# Altium PCB XL6009.PcbDoc
Units mil, origin at the board's own origin, x right, y up, seen from the top; angles counter-clockwise.
Board outline 2140 x 1130 mil, 2 copper layers (Top Layer, Bottom Layer); 11 components, 5 nets, 26 pads, 0 vias.
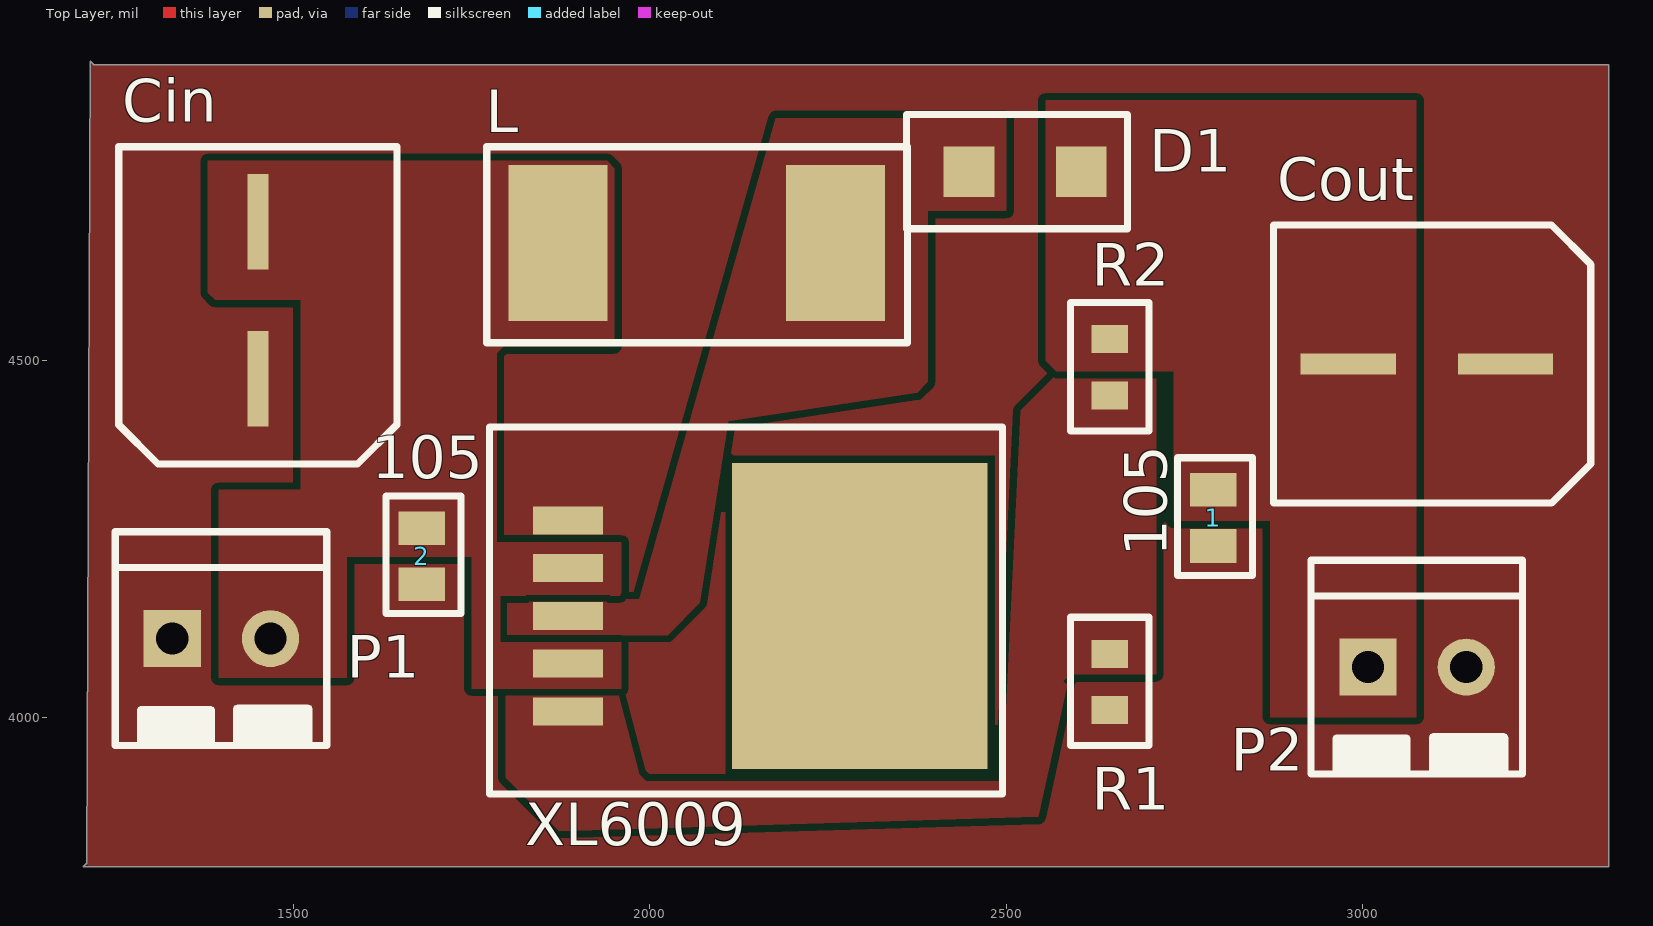
[diagram p0: Top Layer view]
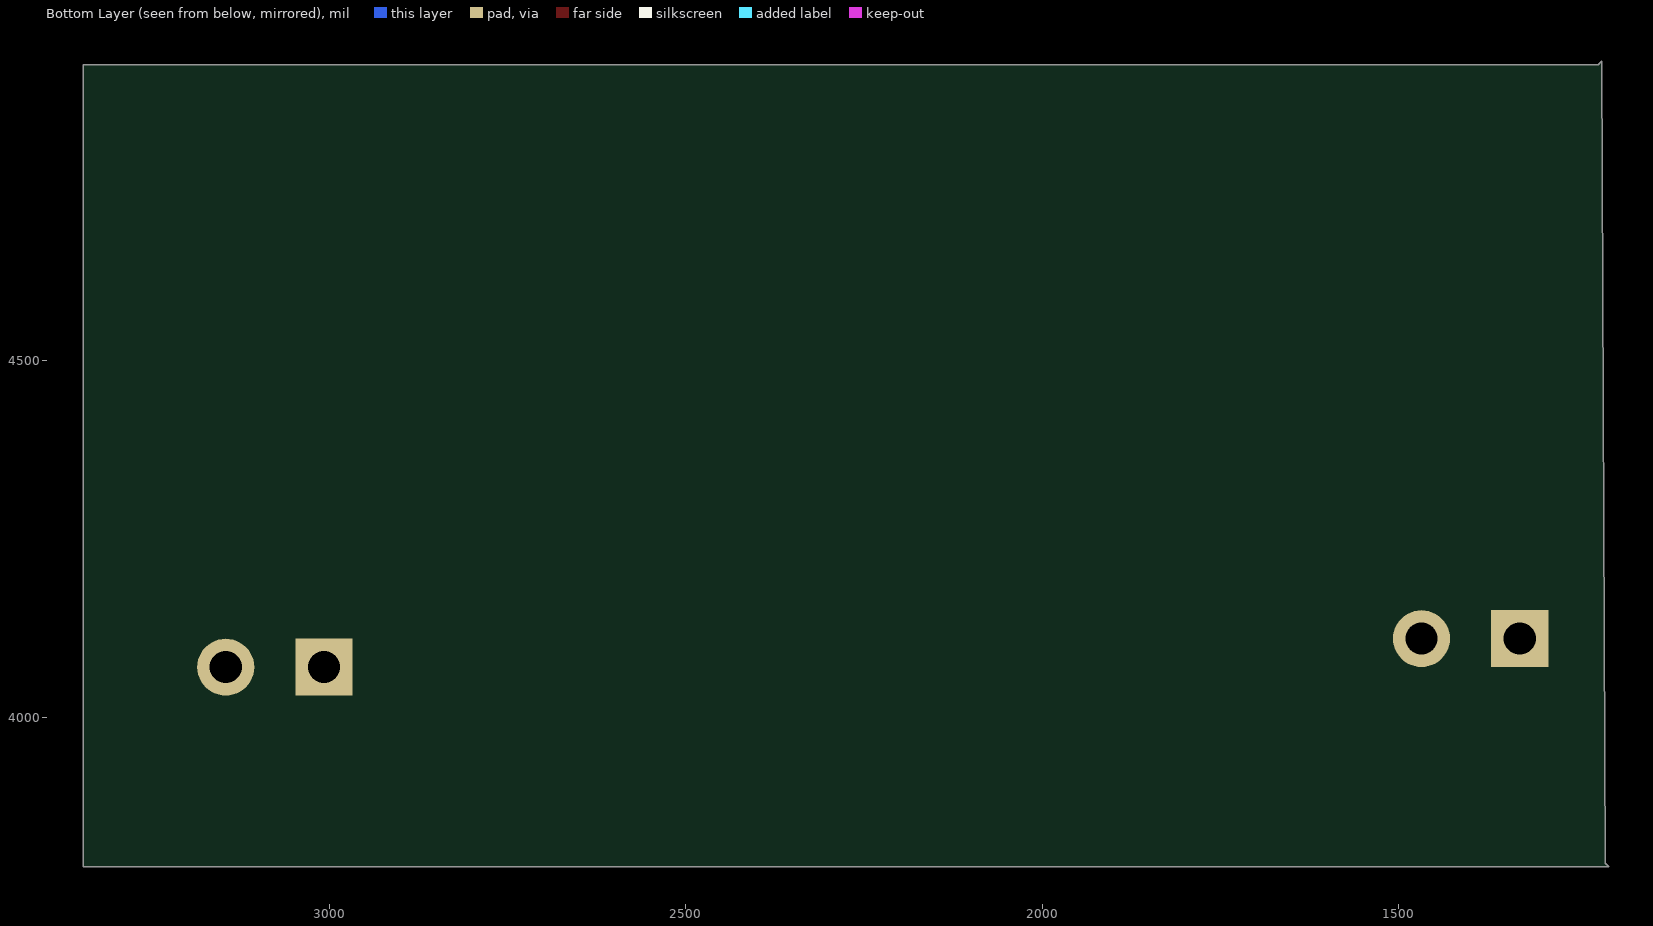
[diagram p1: Bottom Layer view, seen from below]
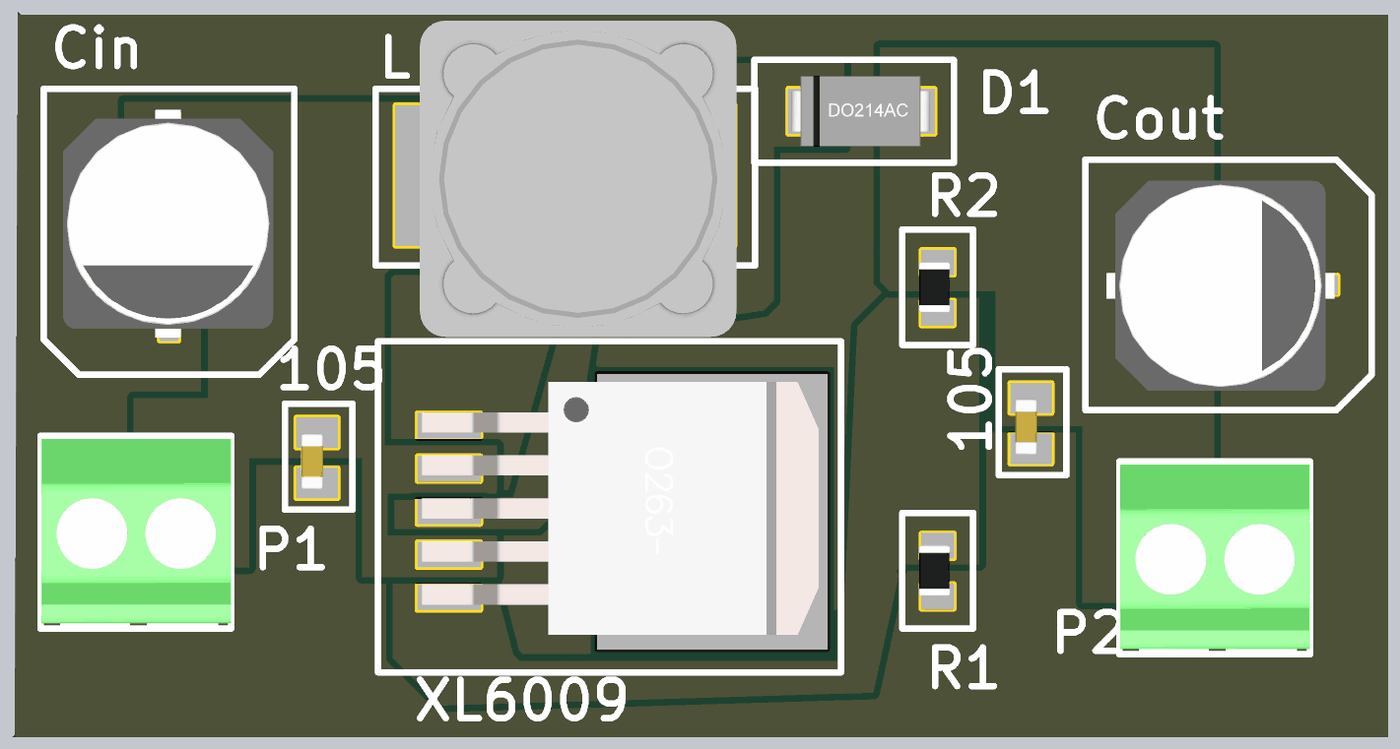
[diagram p2: 3D render of the assembled board from above, using the file's embedded part models]

## Layer stack, top to bottom
Top Solder: solder mask 0.4, Solder Resist, Dk 3.5
Top Layer: signal copper 1.4
Dielectric 1: dielectric 12.6, FR-4, Dk 4.8
Bottom Layer: signal copper 1.4
Bottom Solder: solder mask 0.4, Solder Resist, Dk 3.5

## Board outline
1215,4920 1220,4915 3345,4915 3345,3790 1205,3790 1210,3795

## Design rules (kind name [scope] priority, off if disabled: settings)
Clearance [All] p1: gap=10 ignorepadtopadclearanceinfootprint=FALSE except(0: Arc-Hole Track-Hole SMDPad-Hole THPad-Hole Via-Hole Fill-Hole Poly-Hole Region-Hole Text-Hole)
PolygonConnect [All] p1: connectstyle=Direct reliefconductorwidth=10 reliefentries=4 polygonreliefangle="90 Angle" airgapwidth=10
RoutingVias [All] p1: holewidth=28 width=50 viastyle="Through Hole" minholewidth=28 minwidth=50 maxholewidth=28 maxwidth=50
SolderMaskExpansion [All] p1: expansion=4
Width [All] p1: maxlimit=100 minlimit=10 preferedwidth=10 bottomlayer_maxwidth=10 minimp=50.000000 maximp=50.000000 favimp=50.000000
30 further rules are at their usual default settings.

## Components (designator, comment, footprint, x,y, rotation, side; value= is the part's Value field where it differs from the comment)
1 "105" PCBComponent_1#1 2790,4318.74 r90 top
2 "105" PCBComponent_1#1 1680,4265 r90 top (schematic designator 105)
Cin "47uF/50V" PCBComponent_1#2 1445,4615 r0 top
Cout "220uF/50V" PCBComponent_1#2 3059.53,4490 r90 top
D1 "1N5824" 1N5824 2605,4765 r270 top
L "33uH/50V" PCBComponent_1#3 1871.02,4665 r0 top
P1 "Domino 2" "DOMINO SMALL 2" 1330,4160 r0 top
P2 "Domino 2" "DOMINO SMALL 2" 3007.2,4120 r0 top (schematic designator p2)
R1 "1k Ohm" PCBComponent_1#4 2645,4010 r180 top
R2 "13,8k Ohm" PCBComponent_1#4 2645,4451.26 r180 top
XL6009 "XL6009" XL6009 2274.76,4141.93 r0 top

## Footprints (in the part's own frame and the unit in brackets; to place one, negate y for a bottom-side part, rotate by r counter-clockwise, add the part's x,y. Pads: shape width x height; smd on the part's side, far side on the other; paste and mask are expansions set on the pad)
1N5824 [mm]
  rect 1.8x1.8 smd: 1(0,0) 2(0,-4)
  silkscreen extent -2.03,-6.22 2.03,1.65, body extent -1.4,-4.78 1.4,0.71, height 1.96
"DOMINO SMALL 2" [mil] "3.5 mm"
  rect 80x80 hole 45: 1(0,-50)
  round 80 hole 45: 2(137.8,-50)
  silkscreen extent -80,-203 217,100, body extent -79,-192 217,95, height 335
PCBComponent_1#1 [mm]
  rect 1.2x1.65 smd: 1(0,0) 2(-2,0)
  silkscreen extent -3.05,-1.4 1.14,1.27, body extent -9.14,-11.68 0.63,1.4, height 1.46
PCBComponent_1#2 [mm]
  rect 0.75x3.4 smd: 1(0.127,2.032) 2(0.127,-3.568)
  silkscreen extent -4.83,-6.6 5.08,4.7, body extent -4.06,-5.13 4.24,3.86, height 6.9
PCBComponent_1#3 [mm]
  rect 3.53x5.57 smd: 1(0,0) 2(9.88,0)
  silkscreen extent -2.54,-3.56 12.45,3.43, body extent -0.79,-6.38 11.71,6.12, height 7.5
PCBComponent_1#4 [mm]
  rect 1.3x1 smd: 1(0,0) 2(0,-2)
  silkscreen extent -1.4,-3.3 1.4,1.27, body extent -0.5,-2.02 0.75,-0.02, height 0.8
XL6009 [mm]
  rect 2.5x1 smd: 1(-9.9,3.4) 2(-9.9,1.7) 3(-9.9,0) 4(-9.9,-1.7) 5(-9.9,-3.4)
  rect 9.1x10.9 smd: 6(0.5,0)
  silkscreen extent -12.7,-6.35 5.59,6.73, body extent -10.96,-4.87 4.71,5.13, height 4.78

## Part data
Cin Cout: library part capacitor
D1: library part diode
L: library part "Electrolytic Cap"
P1 P2: "Domino, 2-Pin", LatestRevisionDate=17-Jul-2002, LatestRevisionNote="Re-released for DXP Platform.", Publisher="Altium Limited"
R1 R2: library part resistor

## Nets (pads, with @x,y where several pads share a name; then routed paths per layer and width w, separated by ;. In a path a pad name is that pad's centre, name@x,y a point inside that pad or via, vN(x,y) a via of type N, cw(c..) or ccw(c..) an arc to the next point about the centre after c; other vN are vias at no path point)
GND: 1.2 2.2 Cin.2 Cout.2 P1.1 P2.2 R1.1 XL6009.1
Net1_1: 1.1 Cout.1 D1.1 P2.1 R2.2
NetD1_2: D1.2 L.2 XL6009.3
NetR1_2: R1.2 R2.1 XL6009.5
Vin: 2.1 Cin.1 L.1 P1.2 XL6009.2 XL6009.4
pads on no net: XL6009.6

## Polygon pours and split planes (outlines as drawn)
GND on Top Layer (solid, pour order 22): 1215,4915 3345,4915 3345,3790 1210,3790
NetR1_2 on Top Layer "Top Layer-NetR1_2" (solid, pour order 14): 1955,4035 1795,4035 1797.5,4032.5 1797.5,3915 1872.5,3840 2545,3860 2585,4045 2580,4050 2590,4060 2710,4060 2710,4480 2570,4480 2520,4430 2495,3910 1995,3910 1985,3920
Net1_1 on Top Layer "Top Layer-Net1_1" (solid, pour order 10): 2555,4865 2555,4500 2570,4485 2735,4485 2735,4275 2870,4275 2870,4000 3075,4000 3075,4865
NetD1_2 on Top Layer "Top Layer-NetD1_2" (solid, pour order 8): 1985,4165 1800,4165 1795,4160 1795,4115 2025,4115 2070,4160 2110,4415 2375,4455 2390,4470 2390,4710 2500,4710 2500,4840 2176.67,4840
Vin on Top Layer "Top Layer-Vin" (solid, pour order 6): 1575,4055 1395,4055 1395,4318.74 1508.74,4318.74 1510,4320 1510,4585 1390,4585 1380,4595 1380,4780 1940,4780 1950,4770 1950,4520 1795,4520 1785,4510 1785,4245 1960,4245 1960,4175 1965,4170 1790,4170 1790,4105 1960,4105 1960,4040 1750,4040 1750,4225 1575,4225